# EAGLE board MOTM_to_Eurorack_power_15v_to_12v_design (EAGLE 6.6.0)
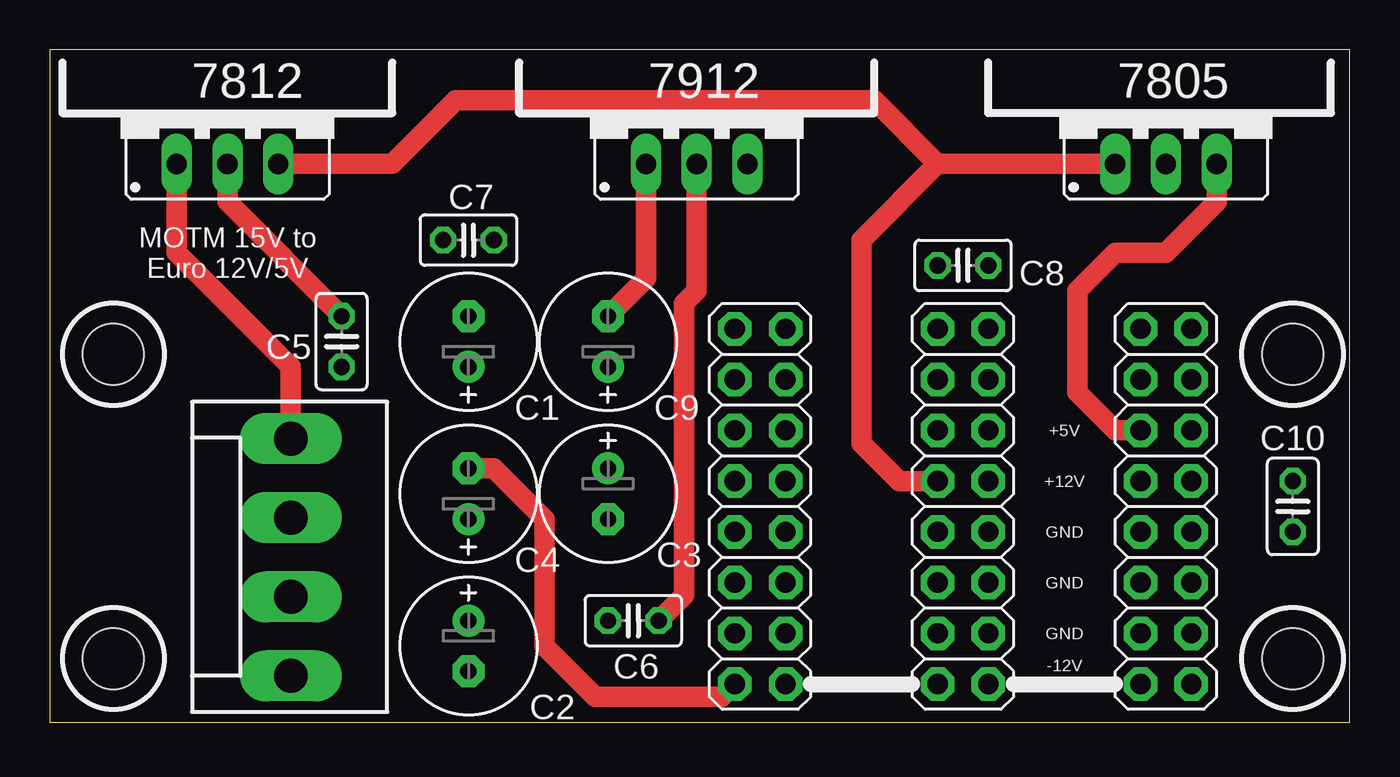
[diagram p0: board, top side]
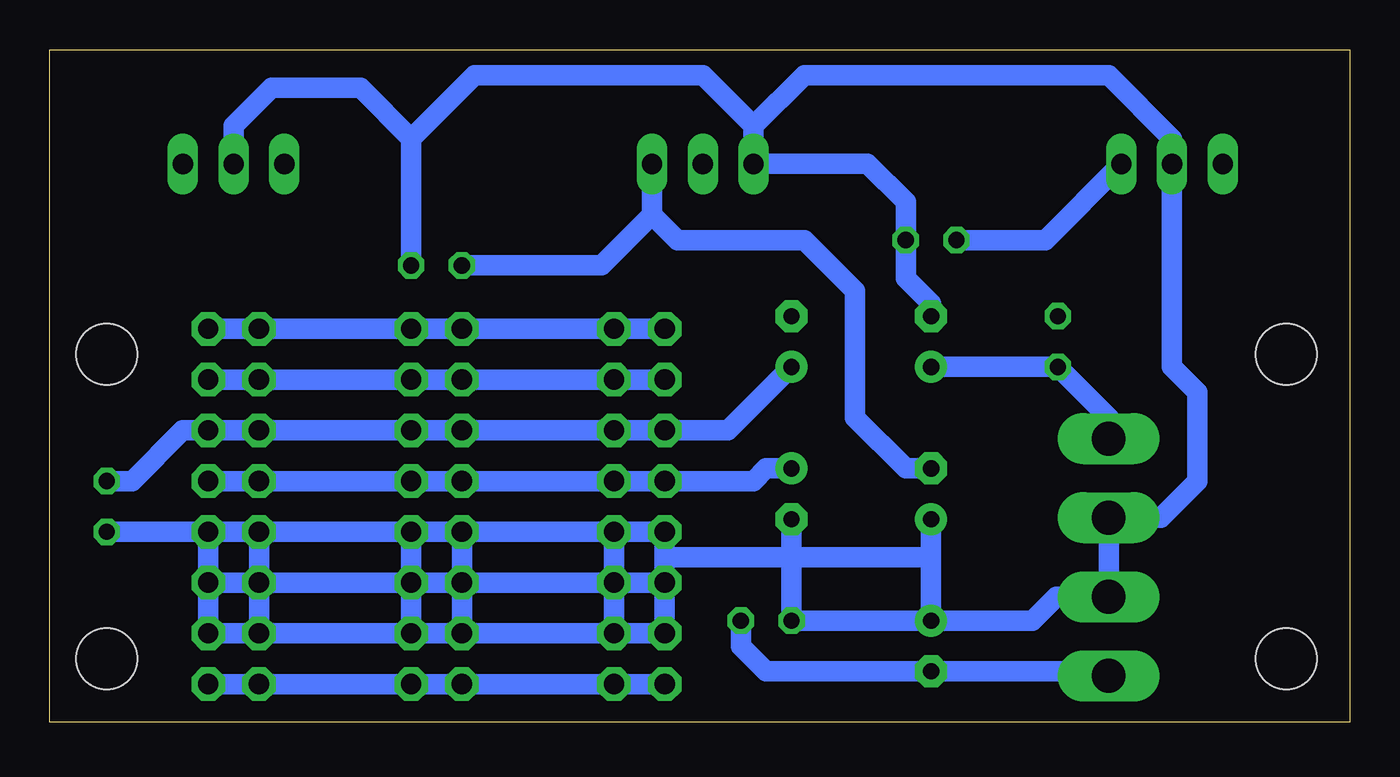
[diagram p1: board, bottom side, seen from below]

Size 65.08 x 33.65 mm. Coordinates in mm from the lower left corner, seen from the top.
Outline: 0,0 65.08,0 65.08,33.65 0,33.65 0,0
Copper layers (1*16): Top 0.035mm / dielectric 1.5mm / Bottom 0.035mm
Design rules "default": minimum track width 10mil, minimum drill 24mil, track to track 8mil, track to pad 8mil, pad to pad 8mil, via to via 8mil, smd to smd 8mil, copper to edge 40mil, drill to drill 8mil, minimum pad ring 10mil, minimum via ring 8mil, stop-mask expansion 4mil, vias tented up to drill 0mil, thermal gap 10mil
Holes 3.05 mm at 3.17,3.17 62.23,3.17 3.17,18.41 62.23,18.41

## Footprints (pad centres in the part's own frame; a part is rotated, then mirrored left to right if it is on the bottom)
KK-156-4 = drill 1.7 pad 2.184 long: 1 -5.94,0; 2 -1.98,0; 3 1.98,0; 4 5.94,0
78XXS = drill 1.016 long: GND 0,-2.54; IN -2.54,-2.54; OUT 2.54,-2.54
79XXS = drill 1.016 long: GND -2.54,-2.54; IN 0,-2.54; OUT 2.54,-2.54
E2,5-7 = drill 0.813 pad 1.6: + -1.27,0 | drill 0.813 pad 1.6 octagon: - 1.27,0
C025-025X050 = drill 0.813 octagon: 1 -1.27,0; 2 1.27,0
2X8 = drill 1.016 pad 1.676 octagon: 1 -10.16,-1.27; 2 -10.16,1.27; 3 -7.62,-1.27; 4 -7.62,1.27; 5 -5.08,-1.27; 6 -5.08,1.27; 7 -2.54,-1.27; 8 -2.54,1.27; 9 0,-1.27; 10 0,1.27; 11 2.54,-1.27; 12 2.54,1.27; 13 5.08,-1.27; 14 5.08,1.27; 15 7.62,-1.27; 16 7.62,1.27

## Placement (x,y rotation side)
15V-INPUT  [KK-156-4]  12.06,8.26 90 top
7805  [78XXS]  55.88,30.48 0 top
7812  [78XXS]  8.89,30.48 0 top
7912  [79XXS]  32.38,30.48 0 top
C1  [E2,5-7]  20.95,19.05 90 top
C2  [E2,5-7]  20.95,3.81 270 top
C3  [E2,5-7]  27.94,11.43 270 top
C4  [E2,5-7]  20.95,11.43 90 top
C5  [C025-025X050]  14.61,19.05 90 top
C6  [C025-025X050]  29.21,5.08 0 top
C7  [C025-025X050]  20.95,24.13 0 top
C8  [C025-025X050]  45.72,22.86 180 top
C9  [E2,5-7]  27.94,19.05 90 top
C10  [C025-025X050]  62.23,10.79 270 top
JP1  [2X8]  35.56,12.06 90 top
JP2  [2X8]  45.72,12.06 90 top
JP3  [2X8]  55.88,12.06 90 top

## Library data of the parts
15V-INPUT = con-molex; OC_FARNELL: unknown; OC_NEWARK: unknown
7805 7812 7912 = v-reg
C1-C10 = resistor
JP1-JP3 = pimoroni

## Nets
+5V: 7805.OUT C9.+ C10.1 JP1.11 JP1.12 JP2.11 JP2.12 JP3.11 JP3.12
+12V: 7805.IN 7812.OUT C3.+ C7.1 JP1.9 JP1.10 JP2.9 JP2.10 JP3.9 JP3.10
+15V: 15V-INPUT.4 7812.IN C1.+ C5.1
-12V: 7912.OUT C4.- C8.2 JP1.1 JP1.2 JP2.1 JP2.2 JP3.1 JP3.2
-15V: 15V-INPUT.1 7912.IN C2.- C6.2
GND: 15V-INPUT.2 15V-INPUT.3 7805.GND 7812.GND 7912.GND C1.- C2.+ C3.- C4.+ C5.2 C6.1 C7.2 C8.1 C9.- C10.2 JP1.3 JP1.4 JP1.5 JP1.6 JP1.7 JP1.8 JP2.3 JP2.4 JP2.5 JP2.6 JP2.7 JP2.8 JP3.3 JP3.4 JP3.5 JP3.6 JP3.7 JP3.8
N$7: JP1.13 JP1.14 JP2.13 JP2.14 JP3.13 JP3.14
N$8: JP1.15 JP1.16 JP2.15 JP2.16 JP3.15 JP3.16

## Tracks (layer width: path | path; a pad name or v marks a point on that pad's centre or on a via)
+5V
  Top 1.016: 7805.OUT 58.42,26.04 55.88,23.5 53.34,23.5 51.44,21.59 51.44,16.51 53.34,14.61 JP3.12
  Bottom 1.016: C9.+ 31.11,14.61 JP1.12 JP1.11 JP2.12 JP2.11 JP3.12 JP3.11 58.42,14.61 60.96,12.06 C10.1
+12V
  Top 1.016: 44.45,27.94 41.27,31.11 20.32,31.11 17.14,27.94 7812.OUT | 7805.IN 44.45,27.94 | 44.45,27.94 40.64,24.13 40.64,13.97 42.55,12.06 JP2.10
  Bottom 1.016: JP3.9 JP3.10 JP2.9 JP2.10 JP1.9 JP1.10 29.84,12.06 29.21,12.7 C3.+ | 7812.OUT 15.24,24.13 C7.1
+15V
  Top 1.016: 15V-INPUT.4 12.06,17.78 6.35,23.5 7812.IN
  Bottom 1.016: C1.+ C5.1 12.06,15.24 15V-INPUT.4
-12V
  Top 1.016: JP1.2 33.66,1.27 27.3,1.27 24.77,3.81 24.77,10.16 22.23,12.7 C4.-
  Bottom 1.016: JP1.2 JP1.1 JP2.2 JP2.1 JP3.2 JP3.1 | 34.92,25.4 37.47,22.86 C8.2 | 34.92,25.4 33.66,24.13 27.3,24.13 24.77,21.59 24.77,15.24 22.23,12.7 C4.- | 34.92,25.4 7912.OUT
-15V
  Top 1.016: 7912.IN 32.38,21.59 31.75,20.95 31.75,6.35 C6.2
  Bottom 0.813: 15V-INPUT.1 13.11,2.31 13.34,2.54
  Bottom 1.016: 13.34,2.54 C2.- 29.21,2.54 30.48,3.81 C6.2
GND
  Top 1.016: 7812.GND 8.89,26.04 C5.2 | C9.- 29.84,22.23 7912.GND
  Bottom 0.813: JP1.7 JP2.8
  Bottom 1.016: JP1.3 JP2.4 | JP2.3 JP3.4 | JP3.5 JP3.6 | JP3.6 JP2.5 | JP2.5 JP2.6 | JP2.5 JP1.5 JP1.6 | JP1.7 JP1.8 34.29,8.26 | JP1.7 JP2.7 | 34.29,8.26 JP1.4 JP1.3 | JP1.3 JP1.7 | JP2.8 JP2.4 | JP2.4 JP2.3 | JP2.3 JP2.7 | JP2.7 JP3.8 | JP3.8 JP3.7 | JP3.7 JP3.5 | JP3.5 JP3.3 JP3.4 | JP3.4 JP3.6 | JP3.6 JP3.8 | 29.84,29.84 27.3,32.38 12.06,32.38 8.89,29.21 7812.GND 8.89,17.78 7.62,16.51 7.62,12.06 9.45,10.23 15V-INPUT.3 15V-INPUT.2 14.68,6.28 15.88,5.08 C2.+ | 7805.GND 55.88,29.84 53.98,31.75 49.53,31.75 46.99,29.21 | 29.84,29.84 32.38,32.38 43.81,32.38 46.99,29.21 | 29.84,29.84 7912.GND 24.13,27.94 22.23,26.04 C7.2 22.23,22.23 20.95,20.95 C1.- | C2.+ C6.1 C3.- | C4.+ 20.95,8.26 | 20.95,8.26 34.29,8.26 | C2.+ 20.95,8.26 | C8.1 46.99,29.21 | C10.2 JP3.7
N$7
  Bottom 1.016: JP1.14 JP1.13 JP2.14 JP2.13 JP3.14 JP3.13
N$8
  Bottom 1.016: JP1.16 JP1.15 JP2.16 JP2.15 JP3.16 JP3.15

## Text on the board
tPlace: MOTM 15V to / Euro 12V/5V | +5V | +12V | GND | GND | GND | -12V